# Altium PCB PCB_4-layer.PcbDoc (part 2 of 2)
Units mm, origin at the board's own origin, x right, y up, seen from the top; angles counter-clockwise.
Board outline 60 x 50 mm, 4 copper layers (Top Copper, Signal Layer 1, Signal Layer 2, Bottom Copper), stack 1.57 mm thick; 115 components, 74 nets, 379 pads, 168 vias.
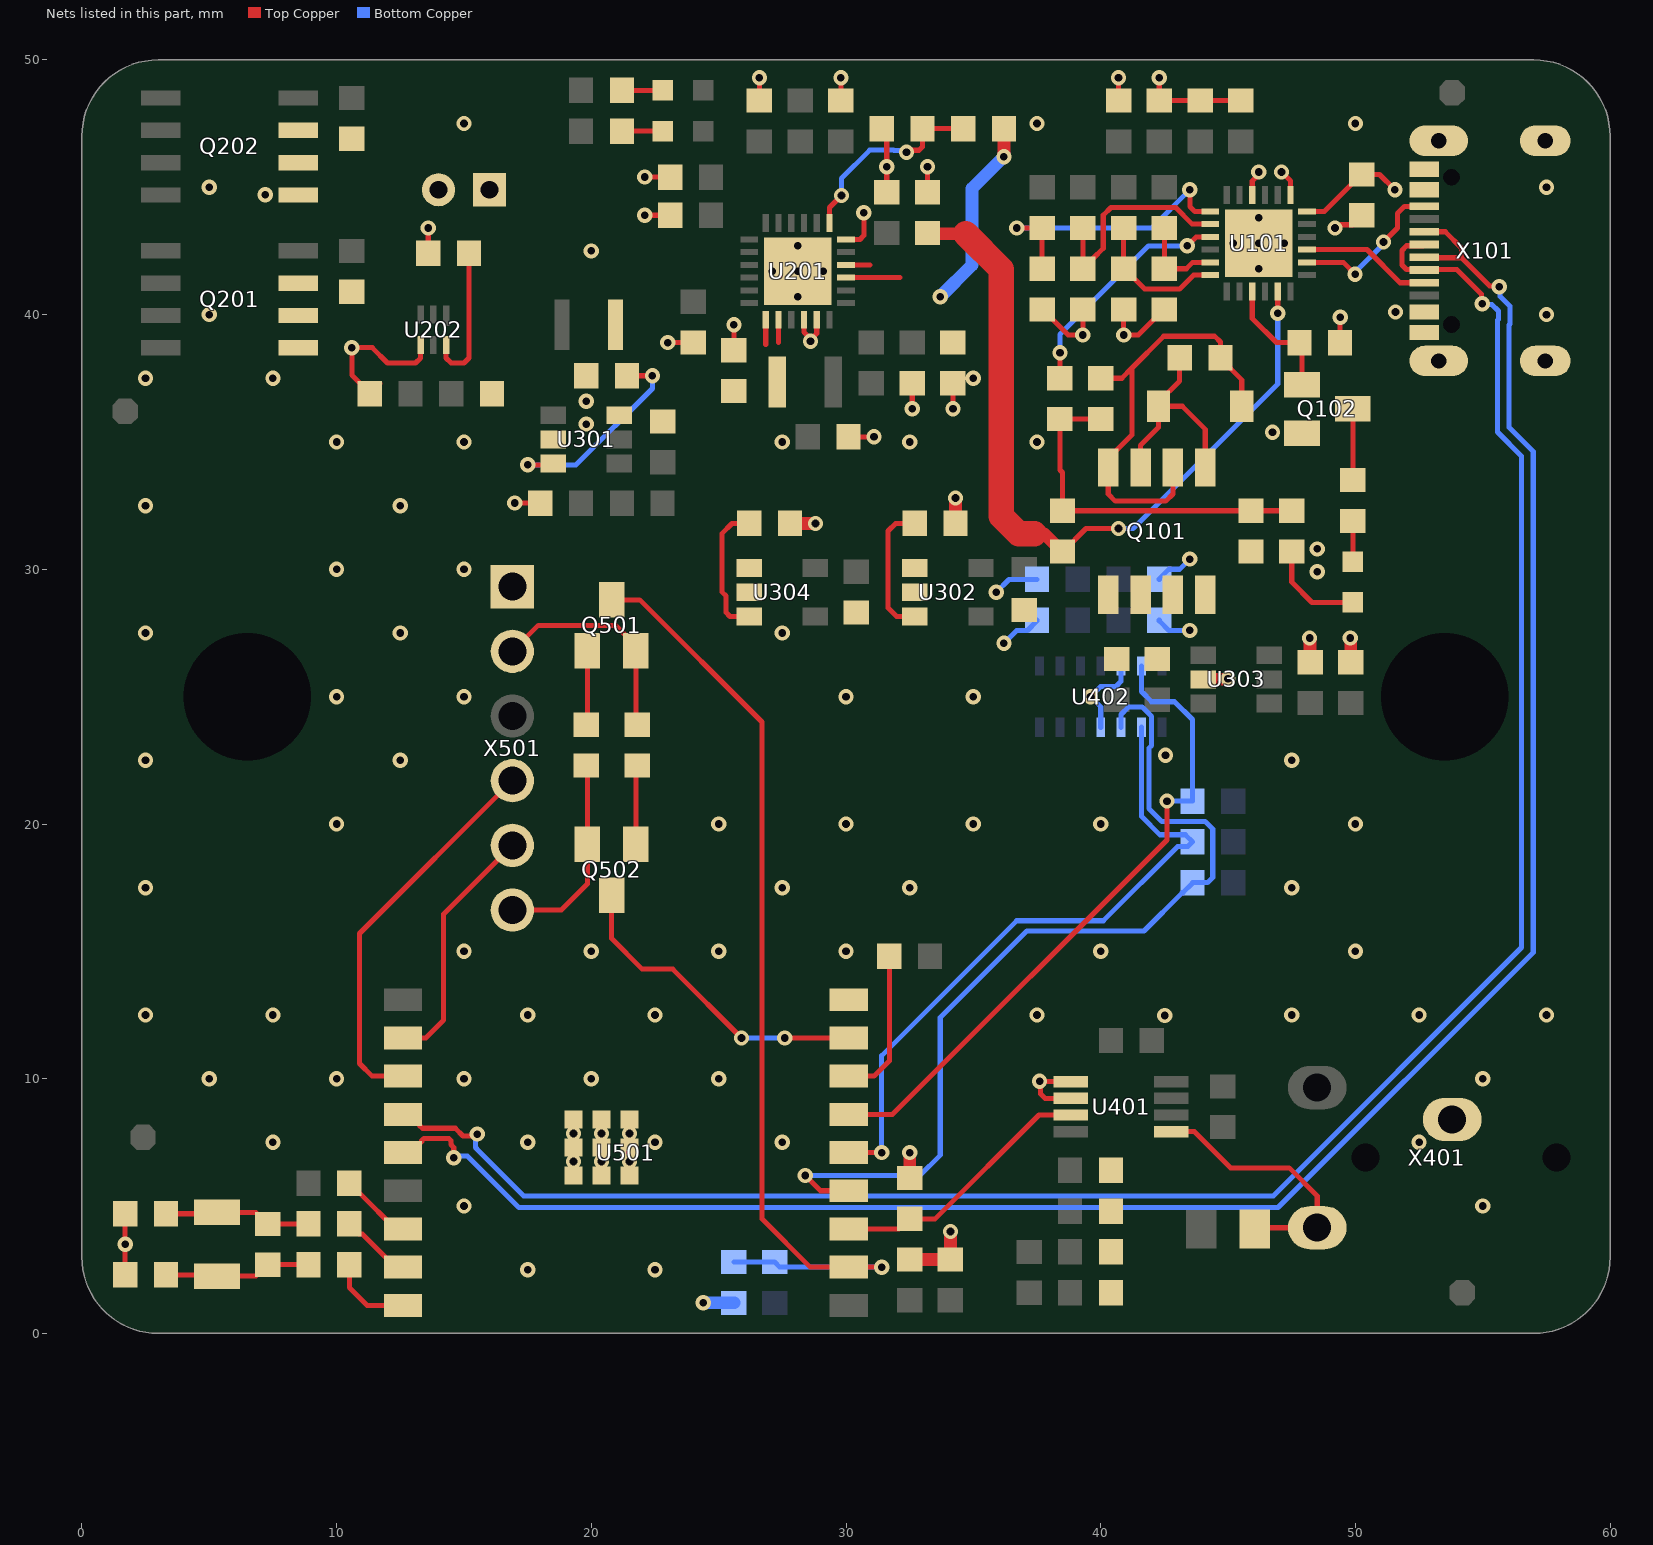
[diagram p4: the nets of this part, all layers, seen from the top]

## Via types
v1: diameter 0.6, hole 0.3, Top Copper to Bottom Copper, tented both sides, 152 vias
v2: diameter 0.6, hole 0.3, Top Copper to Bottom Copper, 16 vias

## Nets (pads, with @x,y where several pads share a name; then routed paths per layer and width w, separated by ;. In a path a pad name is that pad's centre, name@x,y a point inside that pad or via, vN(x,y) a via of type N, cw(c..) or ccw(c..) an arc to the next point about the centre after c; other vN are vias at no path point) (continued)
CHG_VDPM: R203.1 R206.2 U201.1 | length 8
  Top Copper w0.2: U201.1@29.35,43.6 29.35,44.2 v1(29.825,44.675) ; v1(32.375,46.375) 32.45,46.45 32.864,46.45 33,46.586 R206.2@33,47.3 R203.1@34.6,47.3
  Bottom Copper w0.2: v1(29.825,44.675) 29.825,45.35 30.929,46.454 31.871,46.454 31.886,46.439 32.311,46.439 v1(32.375,46.375)
CTS: Q501.2 R508.1 X501.2 | length 8.7
  Top Copper w0.2: X501.2@16.9,26.78 17.92,27.8 20.95,27.8 21.75,27 Q501.2@21.75,26.8 21.75,23.95 R508.1@21.8,23.9
CTS_R: Q502.1 R508.2 | length 3.1
  Top Copper w0.2: Q502.1@21.75,19.2 21.75,22.25 R508.2@21.8,22.3
D201_R: D201.1 R208.2 | length 1.6
  Top Copper w0.2: R208.2@21.2,47.2 D201.1@22.8,47.2
D202_R: D202.1 R209.2 | length 1.6
  Top Copper w0.2: R209.2@21.2,48.8 D202.1@22.8,48.8
DTR: Q502.2 R507.1 X501.6 | length 8
  Top Copper w0.2: X501.6@16.9,16.62 18.82,16.62 19.85,17.65 Q502.2@19.85,19.2 19.85,22.25 R507.1@19.8,22.3
DTR_R: Q501.1 R507.2 | length 2.9
  Top Copper w0.2: R507.2@19.8,23.9 19.85,23.95 Q501.1@19.85,26.8
EDR_IN: R403.2 U401.1 X401.3 | length 10.5
  Top Copper w0.2: U401.1@42.775,7.925 43.675,7.925 45.1,6.5 47.4,6.5 48.5,5.4 X401.3@48.5,4.15 46.1,4.15 R403.2@46.05,4.1
EDR_OUT: C506.2 U401.7 U501.3 | length 10.6
  Top Copper w0.2: U501.3@30.11,4.1 32.075,4.1 32.475,4.5 C506.2@32.5,4.5 33.5,4.5 37.575,8.575 U401.7@38.825,8.575
ESP_EN: C504.1 Q501.3 R502.1 U501.2 | length 38.8
  Top Copper w0.2: Q501.3@20.8,28.8 21.9,28.8 26.7,24 26.7,4.5 28.6,2.6 U501.2@30.11,2.6 v1(31.4,2.6)
  Bottom Copper w0.2: C504.1@25.6,2.8 R502.1@27.2,2.8 27.4,2.6 v1(31.4,2.6)
ESP_IO2: R504.2 U501.16 | length 2.9
  Top Copper w0.2: R504.2@10.5,5.9 10.5,5.875 10.875,5.5 10.91,5.5 12.31,4.1 U501.16@12.61,4.1
ESP_IO8: R506.1 U501.7 | length 5.5
  Top Copper w0.2: U501.7@30.11,10.1 31.1,10.1 31.7,10.7 R506.1@31.7,14.4
ESP_IO9: Q502.3 U501.8 | length 12.6
  Top Copper w0.2: Q502.3@20.8,17.2 20.8,15.5 22,14.3 23.2,14.3 v1(25.9,11.6) ; v1(27.6,11.6) U501.8@30.11,11.6
  Bottom Copper w0.2: v1(25.9,11.6) v1(27.6,11.6)
ESP_OSC_N: R505.1 U501.17 | length 2.8
  Top Copper w0.2: R505.1@10.5,4.3 10.5,4.275 10.875,3.9 11.01,3.9 12.31,2.6 U501.17@12.61,2.6
ESP_OSC_N_R: C505.1 R503.1 R505.2 Y501.1 | length 5.8
  Top Copper w0.2: C505.1@3.3,4.7 5.25,4.7 Y501.1@5.3,4.75 6.825,4.75 7.275,4.3 R503.1@7.3,4.3 R505.2@8.9,4.3
ESP_OSC_P: R501.1 U501.18 | length 3.3
  Top Copper w0.2: R501.1@10.5,2.7 10.5,1.8 11.2,1.1 U501.18@12.61,1.1
ESP_OSC_P_R: C503.1 R501.2 R503.2 Y501.2 | length 5.8
  Top Copper w0.2: C503.1@3.3,2.3 5.25,2.3 Y501.2@5.3,2.25 6.825,2.25 7.275,2.7 R503.2@7.3,2.7 R501.2@8.9,2.7
FET_EN_GATE: D101.2 Q101.2 Q101.4 R102.1 R103.2 | length 17.5
  Top Copper w0.2: R103.2@40,37.5 40.825,37.5 41.225,37.9 ; Q101.2@42.835,33.997 42.835,32.96 42.55,32.675 40.575,32.675 40.295,32.955 Q101.4@40.295,33.997 40.295,34.349 41.225,35.279 41.225,37.9 ; D101.2@45.538,36.4 45.538,37.437 44.7,38.275 R102.1@44.7,38.3 44.7,38.925 44.475,39.15 42.475,39.15 41.225,37.9
FET_EN_SRC: D101.1 Q101.1 Q101.3 R102.2 | length 8.7
  Top Copper w0.2: Q101.3@41.565,33.997 41.565,34.865 42.263,35.563 D101.1@42.263,36.4 ; R102.2@43.1,38.3 43.1,37.392 42.263,36.555 D101.1@42.263,36.4 ; Q101.1@44.105,33.997 44.105,35.495 43.2,36.4 D101.1@42.263,36.4
GND: C103.1 C104.1 C105.1 C106.1 C107.1 C202.1 C203.1 C205.1 C206.1 C207.1 C208.1 C209.1 C301.1 C302.1 C303.1 C304.1 C305.1 C306.1 C307.1 C308.1 C309.1 C310.1 C401.1 C402.1 C403.1 C404.1 C405.1 C406.1 C407.1 C408.1 C501.1 C502.1 C503.2 C504.2 C505.2 C506.1 Q102.2 Q202.1 Q202.2 Q202.3 R112.1 R113.1 R114.1 R115.1 R116.1 R201.1 R205.1 R206.1 R207.2 R211.2 R212.2 R213.1 R302.1 U101.19 U101.22 U101.25 U201.16 U201.17 U201.24 U201.25 U301.2 U302.2 U303.2 U304.2 U401.5 U401.6 U402.4 U402.12 U501.9 U501.19 X101.1 X101.A1-B12 X101.B1-A12 X401.1 X501.1 | length 58.3
  Top Copper w0.2: C503.2@1.7,2.3 v1(1.7,3.5) C505.2@1.7,4.7 ; R201.1@13.6,42.4 v1(13.6,43.4) ; v1(17,32.6) C302.1@18,32.6 ; v1(22.1,43.9) C208.1@23.1,43.9 ; v1(22.1,45.4) R213.1@23.1,45.4 ; v1(23,38.9) C209.1@24,38.9 ; C205.1@25.6,38.6 v1(25.6,39.6) ; R211.2@26.6,48.4 v1(26.6,49.3) ; U201.16@28.35,39.8 28.35,39.308 28.604,39.054 v1(28.604,38.95) ; v1@28.6,39.011 28.85,39.261 U201.17@28.85,39.8 ; R212.2@29.8,48.4 v1(29.8,49.3) ; U201.24@30,42.95 30.55,42.95 30.7,43.1 v1(30.7,44) ; R207.2@30.1,35.2 v1(31.1,35.2) ; R206.1@31.4,47.3 31.6,47.1 v1(31.6,45.8) C207.1@31.6,44.8 ; v1(32.6,36.3) C203.1@32.6,37.3 ; C206.1@33.2,44.8 v1(33.2,45.8) ; v1(34.2,36.3) C202.1@34.2,37.3 ; v1(37.6,9.9) v1@37.613,9.888 ; R115.1@37.7,40.2 37.725,40.2 38.725,39.2 v1(39.3,39.2) R116.1@39.3,40.2 ; U401.6@38.825,9.225 37.821,9.225 37.635,9.411 37.635,9.865 v1@37.613,9.888 ; U401.5@38.825,9.875 38.812,9.888 v1@37.613,9.888 ; C103.1@40.7,48.4 v1(40.7,49.3) ; R114.1@40.9,40.2 v1(40.9,39.2) 41.475,39.2 42.475,40.2 R113.1@42.5,40.2 ; v1(42.3,49.3) C106.1@42.3,48.4 C105.1@43.9,48.4 C104.1@45.5,48.4 ; U101.22@45.95,44.7 45.95,45.242 46.2,45.492 v1(46.2,45.6) ; v1(47.1,45.6) 47.45,45.25 U101.19@47.45,44.7 ; v1(49.2,43.4) 49.308,43.4 49.433,43.525 49.875,43.525 C107.1@50.25,43.9 ; R112.1@49.4,38.9 v1(49.4,39.9)
  Top Copper w0.5: C309.1@27.8,31.8 v1(28.8,31.8) ; C502.1@32.5,2.9 C501.1@34.1,2.9 v1(34.1,4) ; C506.1@32.5,6.1 v1(32.5,7.1) ; C303.1@34.3,31.8 v1(34.3,32.8) ; U303.2@44.025,25.675 44.038,25.687 44.987,25.687 v1(45,25.7) ; v1(48.2,27.3) 48.212,27.287 48.212,26.362 C307.1@48.225,26.35 ; v1(49.8,27.3) 49.812,27.287 49.812,26.363 C308.1@49.825,26.35
  Bottom Copper w0.2: v1(35.9,29.1) 36.4,29.6 C405.1@37.5,29.6 ; v1(36.2,27.1) 36.7,27.6 37.125,27.6 37.5,27.975 C406.1@37.5,28 ; U402.4@40,23.8 40,24.6 v1(39.6,25) 40,25.4 40.6,25.4 40.8,25.6 U402.12@40.8,26.2 ; C407.1@42.3,28 42.3,27.975 42.675,27.6 v1(43.5,27.6) ; C408.1@42.3,29.6 42.3,29.625 42.675,30 43.1,30 v1(43.5,30.4)
  Bottom Copper w0.5: v1(24.4,1.2) C504.2@25.6,1.2
  other v1: 17.5,2.5 22.5,2.5 15,5 55,5 7.5,7.5 17.5,7.5 22.5,7.5 27.5,7.5 52.5,7.5 5,10 10,10 15,10 20,10 25,10 55,10 42.519,12.481 2.5,12.5 7.5,12.5 17.5,12.5 22.5,12.5 37.5,12.5 47.5,12.5 52.5,12.5 57.5,12.5 15,15 20,15 25,15 30,15 40,15 50,15 2.5,17.5 27.5,17.5 32.5,17.5 47.5,17.5 10,20 25,20 30,20 35,20 40,20 50,20 2.5,22.5 12.5,22.5 47.5,22.5 42.543,22.704 10,25 15,25 30,25 35,25 2.5,27.5 12.5,27.5 27.5,27.5 10,30 15,30 2.5,32.5 12.5,32.5 10,35 15,35 27.5,35 32.5,35 37.5,35 46.742,35.375 19.8,35.7 19.8,36.6 2.5,37.5 7.5,37.5 35,37.5 5,40 57.5,40 20,42.5 7.2,44.7 5,45 57.5,45 15,47.5 37.5,47.5 50,47.5
  other v2: 19.3,6.75 20.4,6.75 21.5,6.75 19.3,7.85 20.4,7.85 21.5,7.85 28.1,40.7 27.1,41.7 28.1,41.7 29.1,41.7 46.2,41.8 28.1,42.7 45.2,42.8 46.2,42.8 47.2,42.8 46.2,43.8
NetD102_1: D102.1 R107.2 | length 1.6
  Top Copper w0.2: D102.1@49.9,30.3 R107.2@49.9,31.9
NetQ102_3: Q102.3 R107.1 | length 2.8
  Top Copper w0.2: R107.1@49.9,33.5 Q102.3@49.9,36.3
PD_V-: R201.2 U202.6 | length 5.7
  Top Copper w0.2: U202.6@14.3,38.8 14.3,38.3 14.5,38.1 15,38.1 15.2,38.3 R201.2@15.2,42.4
PPG_I\N\T\: R406.1 U402.13 U501.6 | length 26.1
  Top Copper w0.2: U501.6@30.11,8.6 31.825,8.6 42.6,19.375 v1(42.6,20.9)
  Bottom Copper w0.2: U402.13@41.6,26.2 41.6,25.2 42,24.8 42.9,24.8 43.6,24.1 R406.1@43.6,20.9 v1(42.6,20.9)
PPG_SCL: R405.1 U402.2 U501.5 | length 26.7
  Top Copper w0.2: U501.5@30.11,7.1 v1(31.4,7.1)
  Bottom Copper w0.2: v1(31.4,7.1) 31.4,10.9 36.7,16.2 40.1,16.2 43.021,19.121 43.421,19.121 R405.1@43.6,19.3 43.321,19.579 42.321,19.579 41.6,20.3 U402.2@41.6,23.8
PPG_SDA: R404.1 U402.3 U501.4 | length 36.4
  Top Copper w0.2: v1(28.4,6.2) 29,5.6 U501.4@30.11,5.6
  Bottom Copper w0.2: v1(28.4,6.2) 32.9,6.2 33.7,7 33.7,12.4 37.1,15.8 41.7,15.8 43.2,17.3 43.225,17.3 43.6,17.675 R404.1@43.6,17.7 44.2,17.7 44.4,17.9 44.4,19.8 44.1,20.1 42.4,20.1 41.889,20.611 41.889,22.975 42,23.086 42,24.217 41.617,24.6 41.1,24.6 40.8,24.3 U402.3@40.8,23.8
RXD: U501.11 X501.5 | length 9.9
  Top Copper w0.2: U501.11@12.61,11.6 13.5,11.6 14.2,12.3 14.2,16.46 X501.5@16.9,19.16
TXD: U501.12 X501.4 | length 15.5
  Top Copper w0.2: U501.12@12.61,10.1 11.4,10.1 10.9,10.6 10.9,15.7 X501.4@16.9,21.7
USB_D_N: U501.13 X101.A7 X101.B7 | length 81.5
  Top Copper w0.203: U501.13@12.61,8.6 12.91,8.6 13.258,8.252 13.258,8.164 13.369,8.053 14.656,8.053 14.959,7.75 15.451,7.75 v1(15.527,7.826) ; X101.A7@52.697,42.75 52.649,42.702 52.01,42.702 51.825,42.516 51.825,41.95 52,41.775 52.715,41.775 52.718,41.771 53.977,41.771 54.948,40.8 54.948,40.452 v1(54.975,40.425)
  Bottom Copper w0.203: v1(15.527,7.826) 15.451,7.75 15.451,7.294 15.591,7.154 17.345,5.4 46.775,5.4 56.525,15.15 56.525,34.437 55.575,35.387 55.575,39.777 55.613,39.815 55.613,40.136 55.35,40.398 55.002,40.398 v1(54.975,40.425)
USB_D_P: U501.14 X101.A6 X101.B6 | length 82.5
  Top Copper w0.203: U501.14@12.61,7.1 12.91,7.1 13.344,7.534 13.344,7.561 13.43,7.647 14.402,7.647 14.488,7.561 14.488,7.412 14.6,7.3 14.6,6.899 v1(14.596,6.895) ; X101.A6@52.697,42.25 52.718,42.229 54.166,42.229 ; X101.B6@52.697,43.25 53.525,43.25 54.166,42.609 54.166,42.229 ; v1(55.647,41.097) 55.62,41.123 55.272,41.123 54.166,42.229
  Bottom Copper w0.203: v1(14.596,6.895) 14.672,6.971 15.128,6.971 15.402,6.696 17.156,4.943 46.964,4.943 56.982,14.961 56.982,34.626 56.032,35.576 56.032,39.588 56.07,39.626 56.07,40.325 55.673,40.722 55.673,41.07 v1(55.647,41.097)
USBPD_CC1: U101.15 X101.A5 | length 5.1
  Top Copper w0.2: U101.15@48.1,42.55 50.45,42.55 51.75,41.25 X101.A5@52.697,41.25
USBPD_CC2: U101.14 X101.B5 | length 6.3
  Top Copper w0.2: U101.14@48.1,42.05 49.525,42.05 v1(49.987,41.588) ; v1(51.1,42.85) 51.65,43.4 51.65,43.975 51.925,44.25 X101.B5@52.697,44.25
  Bottom Copper w0.2: v1(49.987,41.588) 49.987,41.662 51.1,42.775 v1(51.1,42.85)
USBPD_FAULT: Q102.1 R112.2 U101.9 | length 5
  Top Copper w0.2: U101.9@45.95,40.9 45.95,39.85 46.9,38.9 R112.2@47.8,38.9 47.9,38.8 Q102.1@47.9,37.25
USBPD_FET_EN: R104.1 U101.3 | length 9.2
  Top Copper w0.2: R104.1@38.4,37.5 v1(38.4,38.5) ; v1(43.4,42.7) 43.75,43.05 U101.3@44.3,43.05
  Bottom Copper w0.2: v1(38.4,38.5) 38.4,39.225 41.875,42.7 v1(43.4,42.7)
USBPD_FET_EN_R: C101.1 C102.1 R101.1 R103.1 R104.2 | length 14.2
  Top Copper w0.2: R103.1@40,35.9 R104.2@38.4,35.9 38.4,33.9 38.5,33.8 C102.1@38.5,32.3 R101.1@45.9,32.3 C101.1@47.5,32.3
USBPD_ISNK_COARSE: R108.1 R113.2 U101.5 | length 3.5
  Top Copper w0.2: R108.1@42.5,43.4 R113.2@42.5,41.8 43.36,41.8 43.61,42.05 U101.5@44.3,42.05
USBPD_ISNK_FINE: R109.1 R114.2 U101.6 | length 5.6
  Top Copper w0.2: R109.1@40.9,43.4 R114.2@40.9,41.8 40.925,41.8 41.725,41 43.1,41 43.65,41.55 U101.6@44.3,41.55
USBPD_VBUS_MAX: R111.1 R116.2 U101.2 | length 8.6
  Top Copper w0.2: R111.1@39.3,43.4 R116.2@39.3,41.8 39.325,41.8 39.7,42.175 39.7,42.2 40.1,42.6 40.1,43.9 40.4,44.2 42.942,44.2 43.592,43.55 U101.2@44.3,43.55
USBPD_VBUS_MIN: R110.1 R115.2 U101.1 | length 11.6
  Top Copper w0.2: v1(36.7,43.4) R110.1@37.7,43.4 R115.2@37.7,41.8 ; v1(43.5,44.9) 43.5,44.246 43.696,44.05 U101.1@44.3,44.05
  Bottom Copper w0.2: v1(36.7,43.4) 42,43.4 v1(43.5,44.9)
VBAT: R202.2 X201.1
VBUS_IN: C101.2 C107.2 D102.2 Q101.7 Q101.8 R101.2 U101.18 X101.A4-B9 X101.B4-A9 | length 8.2
  Top Copper w0.2: C101.2@47.5,30.7 47.5,29.5 48.3,28.7 D102.2@49.9,28.7 ; U101.18@48.1,44.05 48.775,44.05 50.225,45.5 C107.2@50.25,45.5 50.95,45.5 v1(51.55,44.9)
  other v1: 48.5,29.9 48.5,30.8 51.575,40.1
VBUS_OUT: C102.2 C206.2 Q101.5 Q101.6 U101.11 U201.22 | length 31.9
  Top Copper w0.2: U201.22@30,41.95 30.95,41.95 ; C102.2@38.5,30.7 38.525,30.7 39.425,31.6 v1(40.7,31.6) ; v1(46.95,40.05) U101.11@46.95,40.9
  Top Copper w0.5: C206.2@33.2,43.2 33.225,43.175 34.7,43.175 ; 37.4,31.4 37.775,31.4 38.475,30.7 C102.2@38.5,30.7
  Top Copper w1: 34.7,43.175 36.1,41.775 36.1,32.075 36.775,31.4 37.4,31.4
  Bottom Copper w0.2: v1(40.7,31.6) 41.275,31.6 46.95,37.275 v1(46.95,40.05)
VIN: C202.2 R203.2 U201.21 | length 9.8
  Top Copper w0.2: U201.21@30,41.45 32.125,41.45
  Top Copper w0.5: v1(36.2,46.2) R203.2@36.2,47.3
  Bottom Copper w0.5: v1(33.7,40.7) 34.95,41.95 34.95,44.95 v1(36.2,46.2)
VSS: C204.1 Q201.1 Q201.2 Q201.3 R204.2 U202.4 X201.2 | length 5.6
  Top Copper w0.2: C204.1@11.3,36.9 11.3,36.925 10.6,37.625 v1(10.6,38.7) 11.4,38.7 12,38.1 13.1,38.1 13.3,38.3 U202.4@13.3,38.8 ; C204.1@11.675,37.3 C204.1@11.7,37.3
VSYS: C205.2 C301.2 C303.2 C309.2 L201.2 L301.1 U201.13 U201.14 U301.3 U301.6 U302.1 U302.3 U304.1 U304.3 | length 21.3
  Top Copper w0.2: v1(17.5,34.1) 18.45,34.1 U301.3@18.5,34.15 ; C301.2@21.4,37.6 v1(22.4,37.6) ; U304.3@26.2,28.15 25.45,28.15 25.288,28.312 25.288,28.957 25.125,29.119 25.125,31.4 25.525,31.8 C309.2@26.2,31.8 ; 26.85,38.825 U201.13@26.85,39.8 ; 27.35,38.9 U201.14@27.35,39.8 ; U302.3@32.7,28.15 31.99,28.15 31.65,28.49 31.65,31.5 31.95,31.8 C303.2@32.7,31.8
  Bottom Copper w0.2: v1(17.5,34.1) 19.4,34.1 22.4,37.1 v1(22.4,37.6)
pads on no net: FID1.0 FID2.0 FID3.0 FID4.0 U101.4 U101.7 U101.8 U101.10 U101.12 U101.13 U101.16 U101.17 U101.20 U101.21 U201.10 U202.1 U302.4 U303.1 U303.6 U304.4 U402.1 U402.5 U402.6 U402.7 U402.8 U402.14 U501.10 U501.15 X101.0 X101.A8 X101.B8 X401.0 X401.2

## Polygon pours and split planes (outlines as drawn)
GND on Signal Layer 1 "NONET_L-01_P-001" (solid, remove dead copper, pour order 1): 0,0 60,0 60,50 0,50
GND on Signal Layer 2 "NONET_L-01_P-001" (solid, remove dead copper, pour order 2): 0,0 60,0 60,50 0,50
GND on Bottom Copper "NONET_L-01_P-001" (solid, remove dead copper, pour order 3): 0,0 60,0 60,50 0,50
GND on Top Copper "NONET_L-01_P-001" (solid, remove dead copper, pour order 0): 0,0 60,0 60,50 0,50

## Keep-outs
Keep-Out Layer:
  the board outline again, w0.2

## Other copper
Top Copper:
  region net VBAT: 16.7,36.2 ccw(c16.7,37) 17.5,37 17.5,44.8 ccw(c16.6,44.8) 16.6,45.7 15.4,45.7 ccw(c15.4,45.5) 15.2,45.5 15.2,44.3 ccw(c15.4,44.3) 15.4,44.1 15.5,44.1 cw(c15.5,43.3) 16.3,43.3 16.3,37.95 cw(c15.837,37.95) 15.837,37.487 15.687,37.487 ccw(c15.687,37.3) 15.5,37.3 15.5,36.4 ccw(c15.7,36.4) 15.7,36.2
  region net VSS: 10.9,39.3 cw(c10.9,38.9) 11.3,38.9 11.3,38.4 cw(c11,38.4) 11,38.1 7.7,38.1 cw(c7.7,38.4) 7.4,38.4 7.4,41.4 cw(c7.7,41.4) 7.7,41.7 11,41.7 cw(c11,41.4) 11.3,41.4 11.3,40.4 cw(c11,40.4) 11,40.1 9.7,40.1 ccw(c9.7,39.8) 9.4,39.8 9.4,39.6 ccw(c9.7,39.6) 9.7,39.3
  region net GND: 9.2,44.2 ccw(c9.2,44.4) 9.4,44.4 9.4,46.1 cw(c9.6,46.1) 9.6,46.3 11.1,46.3 ccw(c11.1,46.5) 11.3,46.5 11.3,47.5 ccw(c11.1,47.5) 11.1,47.7 7,47.7 ccw(c7,47.5) 6.8,47.5 6.8,44.4 ccw(c7,44.4) 7,44.2
  pour cut-out: 18.65,40.5 18.65,38.7 21.15,38.7 21.15,40.5
  region net +1.8V: 28.3,29.7 29.625,29.7 29.9,29.425 30.9,29.425 30.9,30.4 28.3,30.4
  region net GND: 32.2,29.45 33.325,29.45 33.825,29.95 33.825,32.3 34.775,32.3 34.775,31.3 34.55,31.075 34.55,29.575 33.725,28.75 32.2,28.75
  region net GND: 25.7,29.45 26.825,29.45 27.325,29.95 27.325,32.3 28.275,32.3 28.275,31.3 28.05,31.075 28.05,29.575 27.225,28.75 25.7,28.75
  region net +3.3V: 34.8,29.7 36.325,29.7 36.5,29.525 37.5,29.525 37.5,30.475 35.875,30.475 35.8,30.4 34.8,30.4
  region net VSYS: 32.225,31.3 32.225,32.3 31.775,32.75 25.725,32.75 25.725,33.55 32.3,33.55 33.175,32.675 33.175,31.3
  region net VSYS: 25.725,31.3 25.725,33.55 25.1,34.175 25.1,37.475 26.075,37.475 25.937,37.337 25.937,34.588 26.675,33.85 26.675,31.288
  region net VSYS: 32.2,29.7 33.2,29.7 33.2,31.275 33.175,31.3 33.175,32.3 32.225,32.3 32.225,31.3 32.2,31.275
  region net VSYS: 25.7,29.7 26.7,29.7 26.7,31.275 26.675,31.3 26.675,32.3 25.725,32.3 25.725,31.3 25.7,31.275
  region net VSYS: 25.35,37.475 25.35,36.525 24.45,36.525 23.875,37.1 20.925,37.1 20.925,38.1 24.475,38.1 25.1,37.475
  region net VSYS: 20.6,35.7 21.6,35.7 21.6,36.825 21.875,37.1 21.875,37.8 20.925,37.8 20.925,36.725 20.6,36.4
  region net GND: 18,34.75 19.35,34.75 20.275,35.675 20.275,38.1 19.325,38.1 19.325,35.65 19.125,35.45 18,35.45
  region net +5V: 19.2,32.15 20.025,32.15 20.025,34.225 20.55,34.75 21.6,34.75 21.6,35.45 20.35,35.45 19.2,34.3
  region net BOOST_SW: 19,35.7 19,38.45 19.15,38.6 19.15,40.6 18.55,40.6 18,40.05 18,35.7
  region net VSYS: 20.65,40.6 20.65,38.375 20.925,38.1 20.925,37.1 21.875,37.1 21.875,39.975 21.25,40.6
  region net VIN: 30.65,41.55 30.65,41.35 31.725,41.35 33.7,39.375 33.7,38.425 34.7,38.425 34.7,40.85 34,41.55
  region net VBUS_OUT: 41.975,29.75 39.475,29.75 39,30.225 39,31.175 38,31.175 38,29.875 39.625,28.25 41.975,28.25
  region net VBUS_IN: 48.9,29.8 48.7,29.6 45.85,29.6 44.5,28.25 42.425,28.25 42.425,29.75 43.975,29.75 45.4,31.175 47.925,31.175 48.625,31.175 48.9,30.9
  region net VBUS_OUT: 30.65,42.05 30.65,41.85 33.3,41.85 33.7,42.25 33.7,43.675 32.7,43.675 32.7,42.8 32.375,42.475 31.275,42.475 30.85,42.05
  region net +VBAT: 25.5,40.35 25.175,40.025 23.5,40.025 23.5,40.975 24.5,40.975 24.575,41.05 25.5,41.05
  pour cut-out: 27.15,36.35 29.65,36.35 29.65,38.35 27.15,38.35
  region net VSYS: 26.95,38.35 26.95,38.575 26.75,38.775 26.75,39.125 27.45,39.125 27.65,38.925 27.65,38.35
  region net VSYS: 25.1,37.475 26.075,37.475 26.95,38.35 27.65,38.35 27.65,36.35 26.95,36.35 26.775,36.525 25.1,36.525
  region net CHG_SW: 29.15,38.35 29.15,39.075 29.25,39.175 29.45,39.175 29.85,38.775 29.85,38.35
  region net CHG_SW: 29.15,36.35 30.025,36.35 30.5,36.825 31.5,36.825 31.5,37.775 30.425,37.775 29.85,38.35 29.15,38.35
  region net VBUS_IN: 53.25,45.2 53.25,44.6 51.35,44.6 51.225,44.725 51.225,45.075 51.35,45.2
  region net VBUS_IN: 53.275,40.4 53.275,39.8 51.375,39.8 51.25,39.925 51.25,40.275 51.375,40.4
  region net BP_DD: 2,49 4.2,49 4.2,38.2 2,38.2
Signal Layer 1:
  pour cut-out: 18.65,40.5 18.65,38.7 21.15,38.7 21.15,40.5
  pour cut-out: 27.15,36.35 29.65,36.35 29.65,38.35 27.15,38.35
Signal Layer 2:
  pour cut-out: 18.65,40.5 18.65,38.7 21.15,38.7 21.15,40.5
  pour cut-out: 27.15,36.35 29.65,36.35 29.65,38.35 27.15,38.35
Bottom Copper:
  region net VSS: 11,38.1 ccw(c11,38.4) 11.3,38.4 11.3,42.5 cw(c12.8,42.5) 12.8,44 14.3,44 ccw(c14.3,44.6) 14.9,44.6 14.9,45.4 ccw(c14.5,45.4) 14.5,45.8 11,45.8 ccw(c11,44.9) 10.1,44.9 10.1,38.4 ccw(c10.4,38.4) 10.4,38.1
  pour cut-out: 18.65,40.5 18.65,38.7 21.15,38.7 21.15,40.5
  region net VBUS_IN: 48.25,31.575 47.95,31.275 47.95,30.175 48.25,29.875 49.45,29.875 50.65,31.075 50.65,31.175 50.65,37.8 52.625,39.775 52.125,40.275 51.25,40.275 48.25,37.275
  pour cut-out: 27.15,36.35 29.65,36.35 29.65,38.35 27.15,38.35
  region net VBUS_IN: 51.25,39.925 51.375,39.8 52.675,39.8 53.6,40.725 53.6,44.275 52.675,45.2 51.35,45.2 51.225,45.075 51.225,44.725 52.125,43.825 52.125,41.15 51.375,40.4 51.25,40.275

## Silkscreen, mask and mechanical layers (free items; w line width, h text height)
Bottom Overlay:
  text "Nikola Gudan / Diplomski rad / 2023./2024. / v1.0" at 35,16.794 h1.02
Mechanical 1:
  the board outline again, w0.2
Drill Drawing:
  circle w0.254: c-112.064,121.438 r0.847
  lines w0.254: -112.91,116.782 -112.064,117.205 -111.217,116.782 -111.64,117.628 -111.217,118.475 -112.064,118.052 -112.91,118.475 -112.487,117.628 -112.91,116.782 ; -112.91,125.248 -112.064,124.402 -111.217,125.248 -112.064,126.095 -112.91,125.248 ; -112.91,128.212 -111.217,128.212 -111.217,129.905 -112.91,129.905 -112.91,128.212 ; -112.91,132.022 -111.217,132.022 -111.217,133.715 -112.91,133.715 -112.91,132.022 ; -112.91,136.255 -112.487,136.255 -112.064,135.832 -111.64,136.255 -111.217,136.255 -111.64,136.678 -111.217,137.102 -111.64,137.102 -112.064,137.525 -112.487,137.102 -112.91,137.102 -112.487,136.678 -112.91,136.255 ; -112.91,140.065 -112.487,140.065 -112.487,139.642 -111.64,139.642 -111.64,140.065 -111.217,140.065 -111.217,140.912 -111.64,140.912 -111.64,141.335 -112.487,141.335 -112.487,140.912 -112.91,140.912 -112.91,140.065 ; -112.91,143.452 -112.064,143.875 -111.217,143.452 -111.64,144.298 -111.217,145.145 -112.064,144.722 -112.91,145.145 -112.487,144.298 -112.91,143.452 ; -112.91,147.685 -112.487,147.685 -112.064,147.262 -111.64,147.685 -111.217,147.685 -111.64,148.108 -111.217,148.532 -111.64,148.532 -112.064,148.955 -112.487,148.532 -112.91,148.532 -112.487,148.108 -112.91,147.685 ; -112.572,117.12 -112.064,117.374 -111.556,117.12 -111.81,117.628 -111.556,118.136 -112.064,117.882 -112.572,118.136 -112.318,117.628 -112.572,117.12 ; -112.572,132.36 -111.556,132.36 -111.556,133.376 -112.572,133.376 -112.572,132.36 ; -112.572,136.424 -112.318,136.424 -112.064,136.17 -111.81,136.424 -111.556,136.424 -111.81,136.678 -111.556,136.932 -111.81,136.932 -112.064,137.186 -112.318,136.932 -112.572,136.932 -112.318,136.678 -112.572,136.424
  lines w0.381: -114.429,115.639 168.802,115.639 ; -114.429,149.929 168.802,149.929 ; -100.437,111.829 -100.437,153.739 ; -85.455,111.829 -85.455,153.739 ; -56.253,111.829 -56.253,153.739 ; -43.404,111.829 -43.404,153.739 ; -24.765,111.829 -24.765,153.739 ; 16.37,111.829 16.37,153.739 ; 31.352,111.829 31.352,153.739 ; 59.03,111.829 59.03,153.739 ; 102.451,111.829 102.451,153.739 ; 133.176,111.829 133.176,153.739 ; -114.429,111.829 168.802,111.829 168.802,153.739 -114.429,153.739 -114.429,111.829
  text "Symbol" at -112.143,151.072 h1.83
  text "Count" at -99.294,151.072 h1.83
  text "Hole Size" at -84.312,151.072 h1.83
  text "Plated" at -55.11,151.072 h1.83
  text "Hole Type" at -42.261,151.072 h1.83
  text "Drill Layer Pair" at -23.622,151.072 h1.83
  text "Via/Pad" at 17.513,151.072 h1.83
  text "Pad Shape" at 32.495,151.072 h1.83
  text "Template" at 60.173,151.072 h1.83
  text "Hole Length" at 103.594,151.072 h1.83
  text "Routed Path Length" at 134.319,151.072 h1.83
  text "2" at -99.294,147.262 h1.52
  text "0.600mm (23.62mil)" at -84.312,147.262 h1.52
  text "PTH" at -55.11,147.262 h1.52
  text "Slot" at -42.261,147.262 h1.52
  text "Top Copper - Bottom Copper" at -23.622,147.262 h1.52
  text "Pad" at 17.513,147.262 h1.52
  text "Rounded" at 32.495,147.262 h1.52
  text "r200_120h60_140r100m205_125" at 60.173,147.262 h1.52
  text "1.400mm (55.12mil)" at 103.594,147.262 h1.52
  text "0.800mm (31.50mil)" at 134.319,147.262 h1.52
  text "2" at -99.294,143.452 h1.52
  text "0.600mm (23.62mil)" at -84.312,143.452 h1.52
  text "PTH" at -55.11,143.452 h1.52
  text "Slot" at -42.261,143.452 h1.52
  text "Top Copper - Bottom Copper" at -23.622,143.452 h1.52
  text "Pad" at 17.513,143.452 h1.52
  text "Rounded" at 32.495,143.452 h1.52
  text "r230_120h60_170r100m235_125" at 60.173,143.452 h1.52
  text "1.700mm (66.93mil)" at 103.594,143.452 h1.52
  text "1.100mm (43.31mil)" at 134.319,143.452 h1.52
  text "2" at -99.294,139.642 h1.52
  text "0.650mm (25.59mil)" at -84.312,139.642 h1.52
  text "NPTH" at -55.11,139.642 h1.52
  text "Round" at -42.261,139.642 h1.52
  text "Top Copper - Bottom Copper" at -23.622,139.642 h1.52
  text "Pad" at 17.513,139.642 h1.52
  text "Rounded" at 32.495,139.642 h1.52
  text "c50hn65m0mx0" at 60.173,139.642 h1.52
  text "-" at 103.594,139.642 h1.52
  text "-" at 134.319,139.642 h1.52
  text "2" at -99.294,135.832 h1.52
  text "0.700mm (27.56mil)" at -84.312,135.832 h1.52
  text "PTH" at -55.11,135.832 h1.52
  text "Round" at -42.261,135.832 h1.52
  text "Top Copper - Bottom Copper" at -23.622,135.832 h1.52
  text "Pad" at 17.513,135.832 h1.52
  text "(Mixed)" at 32.495,135.832 h1.52
  text "(Mixed)" at 60.173,135.832 h1.52
  text "-" at 103.594,135.832 h1.52
  text "-" at 134.319,135.832 h1.52
  text "2" at -99.294,132.022 h1.52
  text "1.100mm (43.31mil)" at -84.312,132.022 h1.52
  text "NPTH" at -55.11,132.022 h1.52
  text "Round" at -42.261,132.022 h1.52
  text "Top Copper - Bottom Copper" at -23.622,132.022 h1.52
  text "Pad" at 17.513,132.022 h1.52
  text "Rounded" at 32.495,132.022 h1.52
  text "c50hn110m55" at 60.173,132.022 h1.52
  text "-" at 103.594,132.022 h1.52
  text "-" at 134.319,132.022 h1.52
  text "2" at -99.294,128.212 h1.52
  text "5.000mm (196.85mil)" at -84.312,128.212 h1.52
  text "NPTH" at -55.11,128.212 h1.52
  text "Slot" at -42.261,128.212 h1.52
  text "Top Copper - Bottom Copper" at -23.622,128.212 h1.52
  text "Pad" at 17.513,128.212 h1.52
  text "Rounded Rectangle" at 32.495,128.212 h1.52
  text "s0hn500_2200r50m5" at 60.173,128.212 h1.52
  text "22.000mm (866.14mil)" at 103.594,128.212 h1.52
  text "17.000mm (669.29mil)" at 134.319,128.212 h1.52
  text "3" at -99.294,124.402 h1.52
  text "1.100mm (43.31mil)" at -84.312,124.402 h1.52
  text "PTH" at -55.11,124.402 h1.52
  text "Slot" at -42.261,124.402 h1.52
  text "Top Copper - Bottom Copper" at -23.622,124.402 h1.52
  text "Pad" at 17.513,124.402 h1.52
  text "Rounded" at 32.495,124.402 h1.52
  text "r230_170h110_170r100m235_175" at 60.173,124.402 h1.52
  text "1.700mm (66.93mil)" at 103.594,124.402 h1.52
  text "0.600mm (23.62mil)" at 134.319,124.402 h1.52
  text "6" at -99.294,120.592 h1.52
  text "1.100mm (43.31mil)" at -84.312,120.592 h1.52
  text "PTH" at -55.11,120.592 h1.52
  text "Round" at -42.261,120.592 h1.52
  text "Top Copper - Bottom Copper" at -23.622,120.592 h1.52
  text "Pad" at 17.513,120.592 h1.52
  text "(Mixed)" at 32.495,120.592 h1.52
  text "(Mixed)" at 60.173,120.592 h1.52
  text "-" at 103.594,120.592 h1.52
  text "-" at 134.319,120.592 h1.52
  text "168" at -99.294,116.782 h1.52
  text "0.300mm (11.81mil)" at -84.312,116.782 h1.52
  text "PTH" at -55.11,116.782 h1.52
  text "Round" at -42.261,116.782 h1.52
  text "Top Copper - Bottom Copper" at -23.622,116.782 h1.52
  text "Via" at 17.513,116.782 h1.52
  text "Rounded" at 32.495,116.782 h1.52
  text "(Mixed)" at 60.173,116.782 h1.52
  text "-" at 103.594,116.782 h1.52
  text "-" at 134.319,116.782 h1.52
  text "189 Total" at -99.294,112.972 h1.52
  text "Slot definitions :" at -112.143,109.289 h1.52
  text "Routed Path Length" at -85.913,109.289 h1.52
  text "= Calculated from tool start centre position to tool end centre position." at -57.905,109.289 h1.52
  text "Hole Length" at -85.913,106.75 h1.52
  text "= Routed Path Length + Tool Size = Slot length as defined in the PCB layout" at -68.316,106.75 h1.52

## Text inside footprints (layer, text, board x,y; h text height)
U501: Top Assembly "Antenna" at 24.486,-2.017 h1.02 r180